# Altium PCB VSS-2026.PcbDoc
Units mm, origin at the board's own origin, x right, y up, seen from the top; angles counter-clockwise.
Board outline 75 x 55 mm, 2 copper layers (Top Layer, Bottom Layer), stack 1.671 mm thick; 40 components, 59 nets, 204 pads, 136 vias.
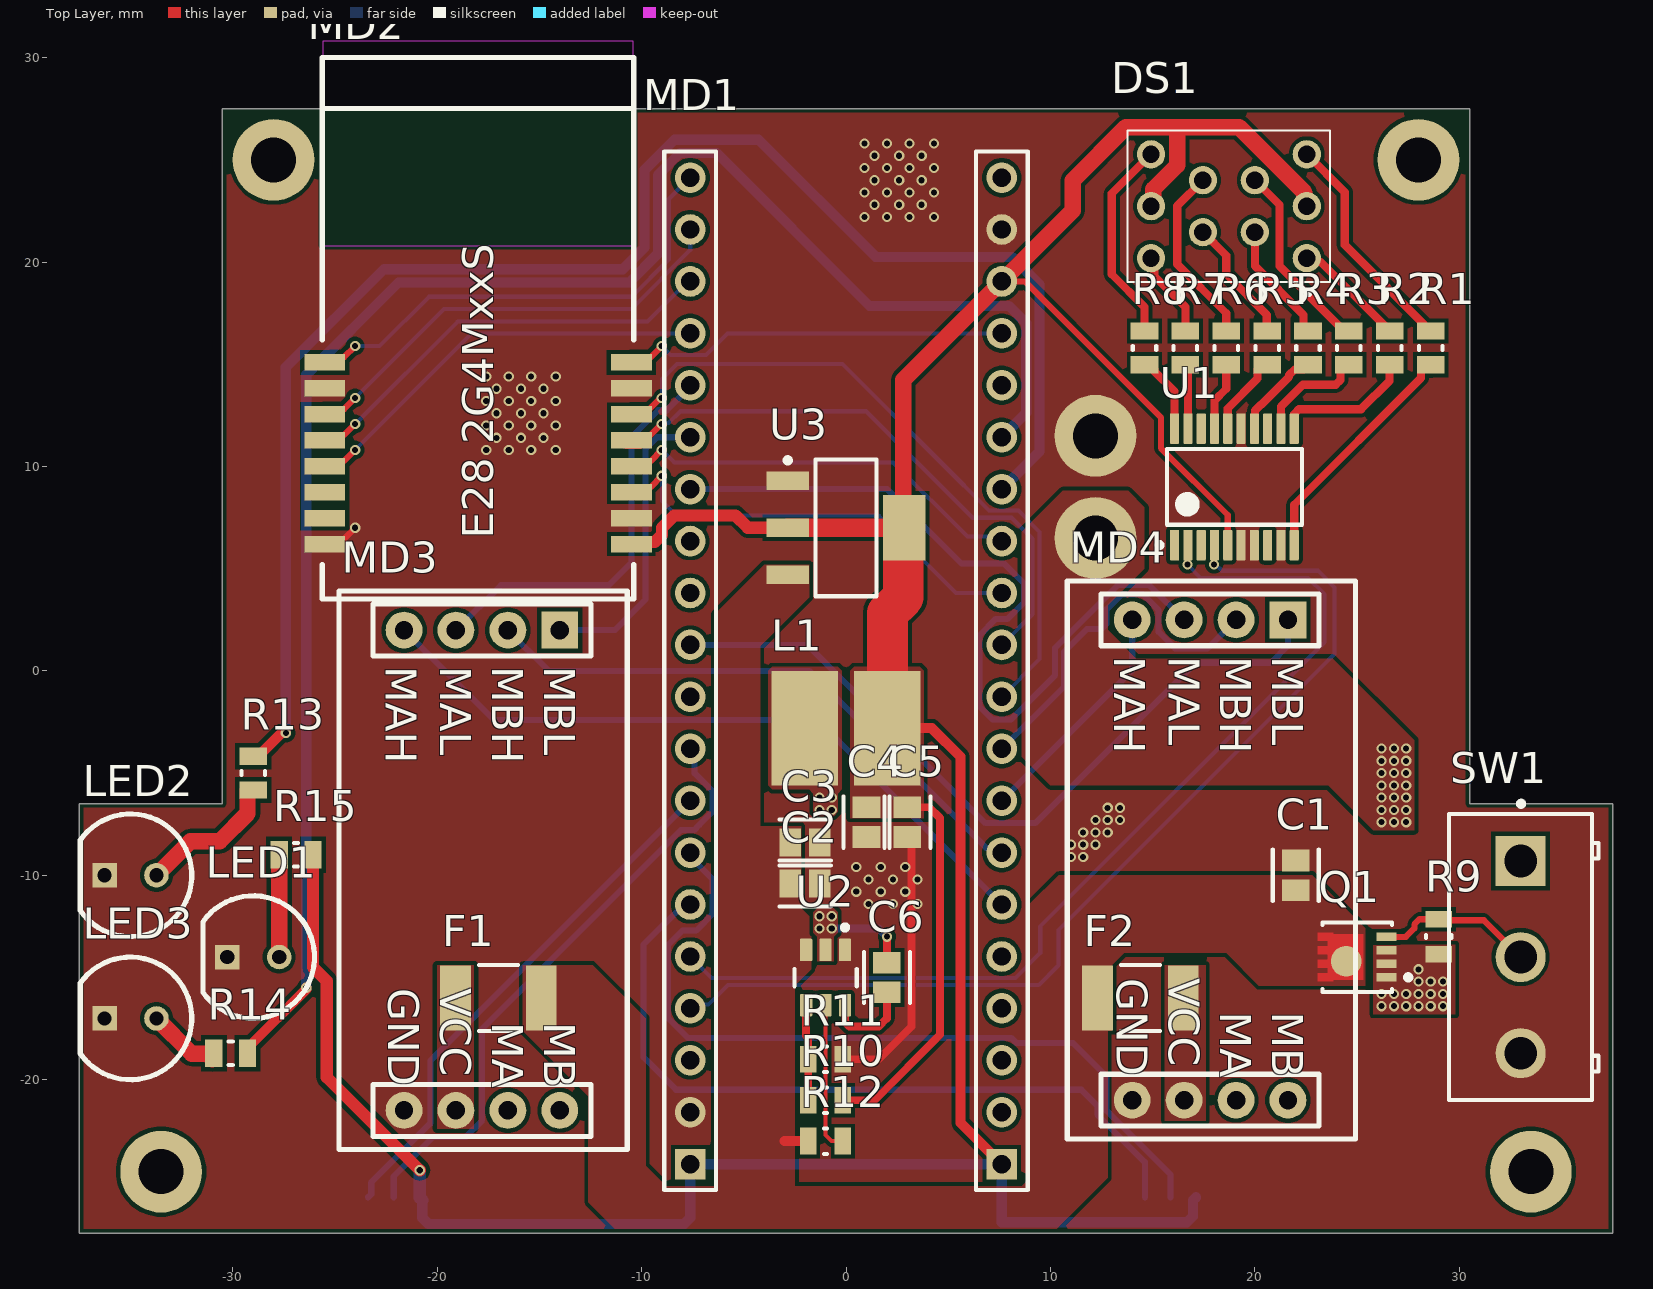
[diagram p0: Top Layer view]
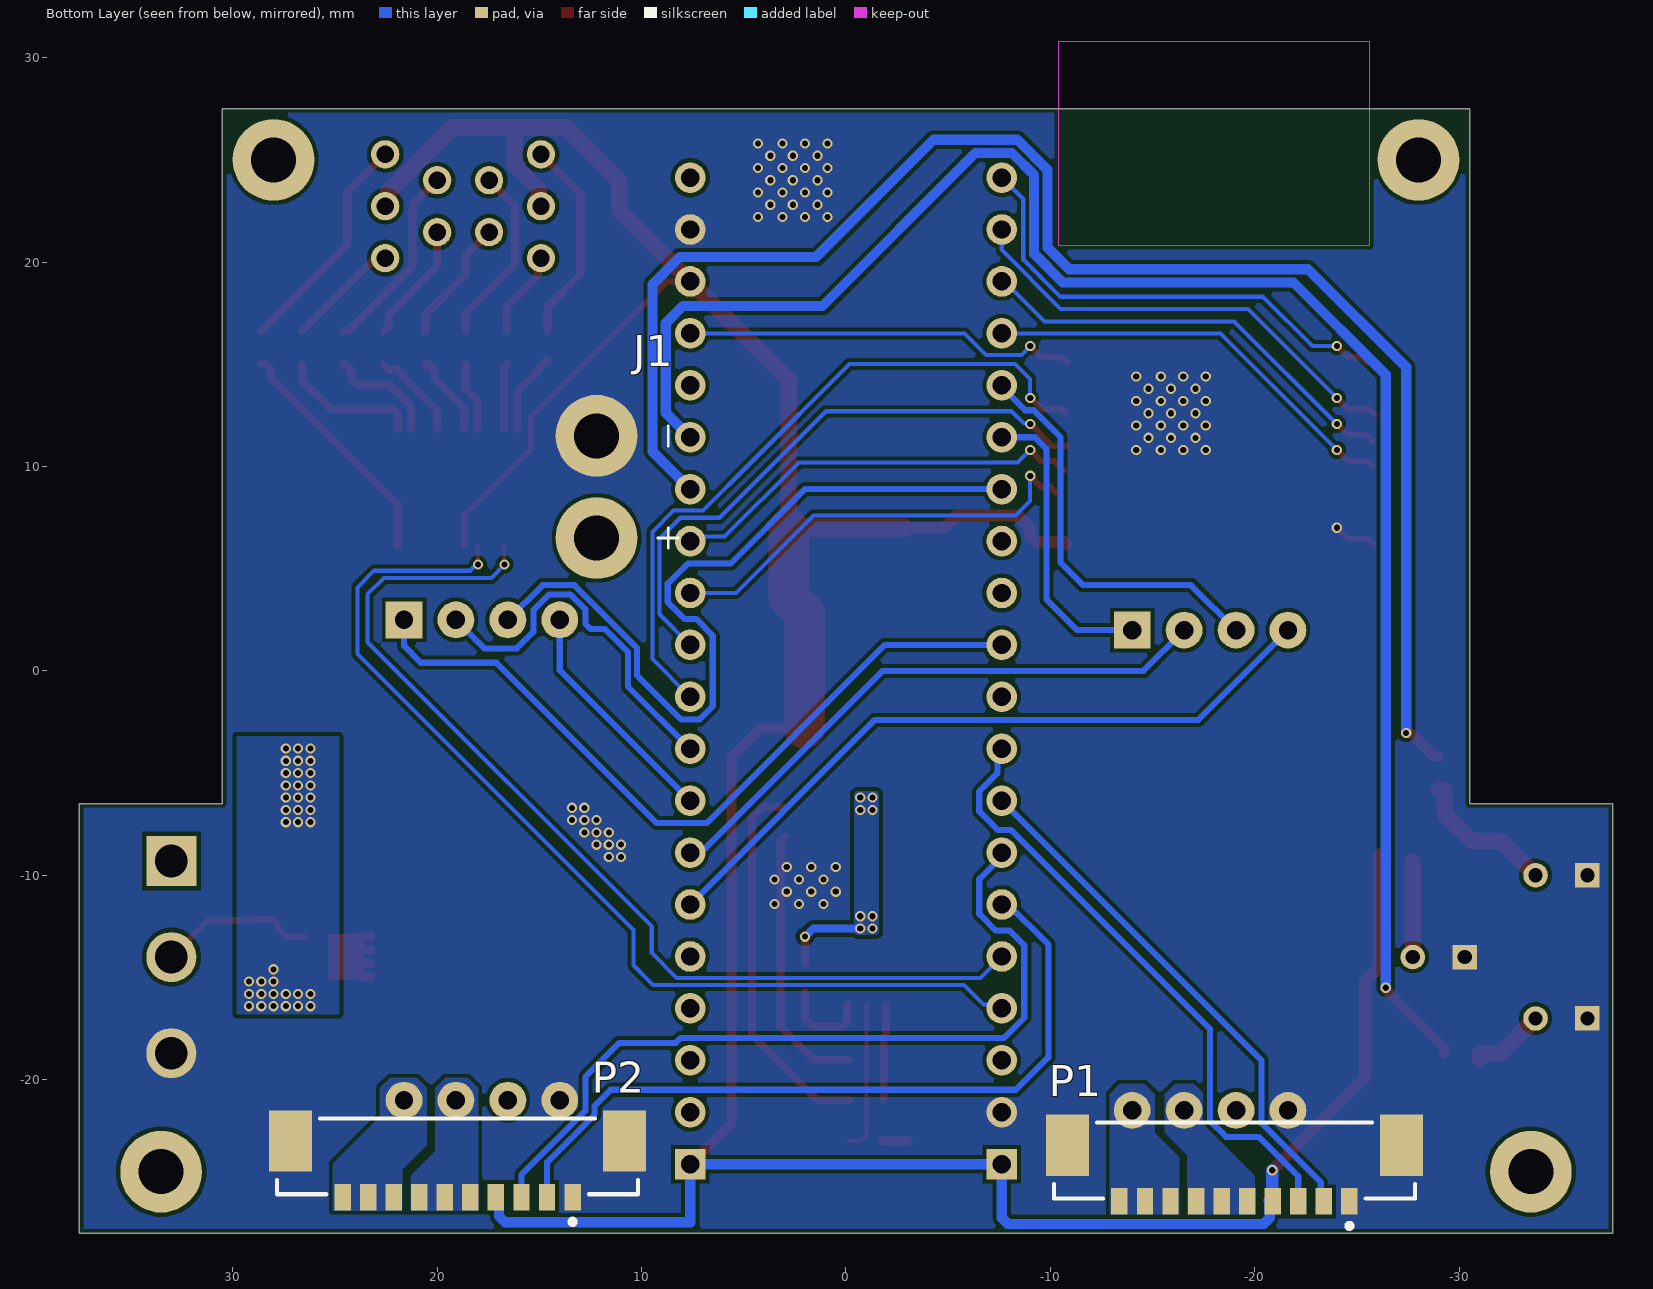
[diagram p1: Bottom Layer view, seen from below]

## Layer stack, top to bottom
Top Solder: solder mask 0.0102, Solder Resist, Dk 3.5
Top Layer: signal copper 0.0356
Dielectric 1: dielectric 1.6, FR-4, Dk 4.8
Bottom Layer: signal copper 0.0356
Bottom Solder: solder mask 0.0102, Solder Resist, Dk 3.5

## Board outline
30.5,27.5 30.5,-6.5 37.5,-6.5 37.5,-27.5 -37.5,-27.5 -37.5,-6.5 -30.5,-6.5 -30.5,27.5

## Design rules (kind name [scope] priority, off if disabled: settings)
BoardOutlineClearance [All] p1: gap=0.2 ignorepadtopadclearanceinfootprint=FALSE
Clearance [All] p1: gap=0.2 ignorepadtopadclearanceinfootprint=TRUE except(0.15: Arc-Arc Arc-Track Track-Track; 0.3: Via-Via)
ComponentClearance [All] p1: gap=0.2 collisioncheckmode=3 verticalgap=0.3 showdistances=FALSE
HoleSize [All] p1: absolutevalues=TRUE maxlimit=6 minlimit=0.2 maxpercent=80.000 minpercent=20.000
MinimumSolderMaskSliver [All] p1: minsoldermaskwidth=0.1
PolygonConnect [All] p1: connectstyle=Direct reliefconductorwidth=0.254 reliefentries=4 polygonreliefangle="90 Angle" airgapwidth=0.254
RoutingVias [All] p1: holewidth=0.3 width=0.5 viastyle="Through Hole" minholewidth=0.3 minwidth=0.5 maxholewidth=1 maxwidth=2
SolderMaskExpansion SolderMaskExpansion_via [IsVia] p1: expansion=0.102 istentingtop=TRUE
SolderMaskExpansion [All] p2: expansion=0.102 istentingtop=FALSE
SupplyNets "Schematic Supply Nets_4" [InNet('VBAT_SW')] p1: voltage=0.000
SupplyNets "Schematic Supply Nets_3" [InNet('VBAT')] p2: voltage=0.000
SupplyNets "Schematic Supply Nets_2" [InNet('3V3')] p3: voltage=0.000
SupplyNets "Schematic Supply Nets_1" [InNet('GND')] p4: voltage=0.000
Width [All] p1: maxlimit=2 minlimit=0.2 preferedwidth=0.3
27 further rules are at their usual default settings.

## Components (designator, comment, footprint, x,y, rotation, side; value= is the part's Value field where it differs from the comment)
C1 "10uF" FP-CL21-IPC_C 22,-10 r90 top
C2 "10uF" FP-CL21-IPC_C -2,-10.4 r0 top
C3 "100nF" FP-CL21-IPC_C -2,-8.4 r0 top
C4 "22uF" FP-CL21-IPC_C 1,-7.4 r270 top
C5 "22uF" FP-CL21-IPC_C 3,-7.4 r270 top
C6 "100nF" FP-CL21-IPC_C 2,-15 r270 top
DS1 "TDSG1150-LM" TDSG1150LM 22.54,20.19 r90 top
F1 "MF-MSMF030-2" BOUR-MF-MSMF030-2_V -17,-16 r0 top
F2 "MF-MSMF030-2" BOUR-MF-MSMF030-2_V 14.4,-16 r180 top
J1 "XT30" XT30 12.2,9 r90 bottom
L1 "CY54-2.2UH" INDP5852X48N 0,-2.8 r180 top
LED1 "LED_5mm" LED_5mm -29,-14 r0 top
LED2 "LED_5mm" LED_5mm -35,-10 r0 top
LED3 "LED_5mm" LED_5mm -35,-17 r0 top
MD1 "BlackPill" BlackPill 0,0 r90 top locked
MD2 "E28-2G4MxxS" E28-2G4M12S -18,6.2 r180 top
MD3 "PONTE-H MÓDULO DIP" PONTEH-PCB -14,-21.5 r270 top
MD4 "PONTE-H MÓDULO DIP" PONTEH-PCB 21.62,-21 r270 top locked
P1 "53398-1071" MOLX-53398-1071_V -19,-24.2 r180 bottom
P2 "53398-1071" MOLX-53398-1071_V 19,-24 r180 bottom locked
Q1 "SI7655ADN-T1-GE3" FP-C20-0862-SINGLE-MFG 25,-14 r180 top
R1 "100R" RESC2013X50X30LL20T20 28.6,15.8 r90 top
R2 "100R" RESC2013X50X30LL20T20 26.6,15.8 r90 top
R3 "100R" RESC2013X50X30LL20T20 24.6,15.8 r90 top
R4 "100R" RESC2013X50X30LL20T20 22.6,15.8 r90 top
R5 "100R" RESC2013X50X30LL20T20 20.6,15.8 r90 top
R6 "100R" RESC2013X50X30LL20T20 18.6,15.8 r90 top
R7 "100R" RESC2013X50X30LL20T20 16.6,15.8 r90 top
R8 "100R" RESC2013X50X30LL20T20 14.6,15.8 r90 top
R9 "100k" FP-CRCW0805-e3-IPC_C 29,-13 r270 top
R10 "33.2kΩ" FP-CRCW0805-e3-IPC_C -1,-21 r0 top
R11 "10kΩ" FP-CRCW0805-e3-IPC_C -1,-19 r180 top
R12 "10kΩ" FP-CRCW0805-e3-IPC_C -1,-23 r0 top
R13 "100R" RESC2013X50X30LL20T20 -29,-5 r270 top
R14 "100R" RESC2013X50X30LL20T20 -30.1,-18.7 r180 top
R15 "100R" RESC2013X50X30LL20T20 -26.9,-9 r0 top
SW1 "CS12ANW03" FP-CS12ANW03-MFG 33,-14 r270 top locked
U1 "PCF8574PWR" PW0020A_L 19,9 r90 top
U2 "TPS563208DDCR" FP-DDC0006A-MFG -1,-15 r270 top
U3 "LD1117STR" SOT-223_L 0,7 r0 top

## Footprints (in the part's own frame and the unit in brackets; to place one, negate y for a bottom-side part, rotate by r counter-clockwise, add the part's x,y. Pads: shape width x height; smd on the part's side, far side on the other; paste and mask are expansions set on the pad)
BlackPill [mm] "STM32F4x1C BluePill"
  rect 1.5x1.5 hole 0.9: 1(-24.13,-7.62) 40(-24.13,7.62)
  round 1.5 hole 0.9: 2(-21.59,-7.62) 3(-19.05,-7.62) 4(-16.51,-7.62) 5(-13.97,-7.62) 6(-11.43,-7.62) 7(-8.89,-7.62) 8(-6.35,-7.62) 9(-3.81,-7.62) 10(-1.27,-7.62) 11(1.27,-7.62) 12(3.81,-7.62) 13(6.35,-7.62) 14(8.89,-7.62) 15(11.43,-7.62) 16(13.97,-7.62) 17(16.51,-7.62) 18(19.05,-7.62) 19(21.59,-7.62) 20(24.13,-7.62) 21(24.13,7.62) 22(21.59,7.62) 23(19.05,7.62) 24(16.51,7.62) 25(13.97,7.62) 26(11.43,7.62) 27(8.89,7.62) 28(6.35,7.62) 29(3.81,7.62) 30(1.27,7.62) 31(-1.27,7.62) 32(-3.81,7.62) 33(-6.35,7.62) 34(-8.89,7.62) 35(-11.43,7.62) 36(-13.97,7.62) 37(-16.51,7.62) 38(-19.05,7.62) 39(-21.59,7.62)
  silkscreen extent -25.4,-8.89 25.4,8.89, body extent -29.98,-10.16 26.66,10.16, height 16.26
BOUR-MF-MSMF030-2_V [mm] "SMD, 2-Leads, Body 4.55x3.24mm"
  rect 1.5x3.2 smd: 1(-2.1,0) 2(2.1,0)
  silkscreen extent -0.95,-1.62 0.95,1.62, body extent -2.27,-1.62 2.27,1.62, height 1.1
E28-2G4M12S [mm] "E28-2G4M12S Module"
  rect 2x0.8 smd: 1(-7.5,0) 2(-7.5,-1.27) 3(-7.5,-2.54) 4(-7.5,-3.81) 5(-7.5,-5.08) 6(-7.5,-6.35) 7(-7.5,-7.62) 8(-7.5,-8.89) 9(7.5,-8.89) 10(7.5,-7.62) 11(7.5,-6.35) 12(7.5,-5.08) 13(7.5,-3.81) 14(7.5,-2.54) 15(7.5,-1.27) 16(7.5,0)
  silkscreen extent -7.62,-23.81 7.62,2.69, body extent -7.5,-21.31 7.5,2.69, height 2.83
FP-C20-0862-SINGLE-MFG [mil]
  rect 39x16 smd paste+0 mask+0: 1(-56.5,39) 2(-56.5,13) 3(-56.5,-13) 4(-56.5,-39)
  round 59.4 smd paste+0 mask+0: 5-6-7-8(21,8)
  Top Layer region: 76,47 46,47 46,44 -12,44 -12,-44 46,-44 46,-47 76,-47 76,-31 56,-31 56,-21 76,-21 76,-5 56,-5 56,5 76,5 76,21 56,21 56,31 76,31 76,47
  silkscreen extent -103,-67 67,67, body extent -80,-71 80,71, height 10
FP-CL21-IPC_C [mm]
  rect 1.055x1.356 smd paste+0 mask+0: 1(-0.726,0) 2(0.726,0)
  silkscreen extent -1.25,-1.12 1.25,1.12, body extent -1.35,-0.82 1.35,0.82, height 0.25
FP-CRCW0805-e3-IPC_C [mil]
  rect 31.75x51.5 smd paste+0 mask+0: 1(-33.5,0) 2(33.5,0)
  silkscreen extent -3,-25 3,25, body extent -53,-31 53,31, height 10
FP-CS12ANW03-MFG [mm]
  rect 2.45x2.45 hole 1.6 paste-2539.97 mask+0: 1(-4.7,0)
  round 2.45 hole 1.6 paste-2539.97 mask+0: 2(0,0) 3(4.7,0)
  silkscreen extent -7.62,-3.5 7,3.8, body extent -7.1,-3.6 7.1,3.91, height 0.25
FP-DDC0006A-MFG [mm]
  rrect17% 1.1x0.6 smd paste+0 mask+0: 1(-1.35,0.95) 2(-1.35,0) 3(-1.35,-0.95) 4(1.35,-0.95) 5(1.35,0) 6(1.35,0.95)
  silkscreen extent -2.57,-1.53 0.42,1.53, body extent -2,-1.63 2,1.63, height 0.25
INDP5852X48N [mm] "Precision Wire Wound Inductor, 2-Leads, Body 5.80x5.20mm, IPC Medium Density"
  rect 3.25x5.6 smd: 1(-2.025,0) 2(2.025,0)
  body extent -3,-2.75 3,2.75, height 4.95
LED_5mm [mm] "LED 5mm generic"
  rect 1.2x1.2 hole 0.7: 1(-1.27,0)
  round 1.2 hole 0.7: 2(1.27,0)
  silkscreen extent -2.46,-3 3,3, body extent -2.5,-2.99 3,2.99, height 8.65
MOLX-53398-1071_V [mm] "SMD, 10-Leads, Body 17.65x3.7mm, Pitch 1.25mm"
  rect 0.8x1.3 smd: 1(5.625,-1.75) 2(4.375,-1.75) 3(3.125,-1.75) 4(1.875,-1.75) 5(0.625,-1.75) 6(-0.625,-1.75) 7(-1.875,-1.75) 8(-3.125,-1.75) 9(-4.375,-1.75) 10(-5.625,-1.75)
  rect 2.1x3 smd: MP1(8.175,1) MP2(-8.175,1)
  silkscreen extent -8.82,-3.07 8.82,2.1, body extent -8.82,-2.1 8.83,2.1, height 4.77
PONTEH-PCB [mm]
  rect 1.8x1.8 hole 0.9: 1(-23.495,0)
  round 1.8 hole 0.9: 2(-23.495,-2.54) 3(-23.495,-5.08) 4(-23.495,-7.62) 5(0,-7.62) 6(0,-5.08) 7(0,-2.54) 8(0,0)
  silkscreen extent -25.4,-10.8 1.9,3.3, body extent -25.46,-10.79 1.84,3.3, height 14.75
PW0020A_L [mm] "SOP, 20-Leads, Body 6.6x4.5mm, Pitch 0.65mm, IPC High Density"
  rrect25% 1.5x0.45 smd mask+0: 1(-2.85,2.925) 2(-2.85,2.275) 3(-2.85,1.625) 4(-2.85,0.975) 5(-2.85,0.325) 6(-2.85,-0.325) 7(-2.85,-0.975) 8(-2.85,-1.625) 9(-2.85,-2.275) 10(-2.85,-2.925) 11(2.85,-2.925) 12(2.85,-2.275) 13(2.85,-1.625) 14(2.85,-0.975) 15(2.85,-0.325) 16(2.85,0.325) 17(2.85,0.975) 18(2.85,1.625) 19(2.85,2.275) 20(2.85,2.925)
  silkscreen extent -2.97,-3.3 1.85,3.8, body extent -3.21,-3.25 3.21,3.25, height 1
RESC2013X50X30LL20T20 [mm] "Chip Resistor, 2-Leads, Body 2.00x1.25mm, IPC High Density"
  rect 0.85x1.35 smd: 1(-0.825,0) 2(0.825,0)
  silkscreen extent -0.1,-0.58 0.1,0.58, body extent -1.1,-0.72 1.1,0.72, height 0.5
SOT-223_L [mm] "SOT223, 4-Leads, Body 6.5x3.5mm, Pitch 2.3mm, Lead Span 7mm, IPC High Density"
  rect 2.1x0.9 smd: 1(-2.85,2.3) 2(-2.85,0) 3(-2.85,-2.3)
  rect 2.1x3.2 smd: 4(2.85,0)
  silkscreen extent -2.97,-3.35 1.5,3.42, body extent -1.85,-3.35 1.85,3.35, height 1.8
TDSG1150LM [mm]
  round 1.381 hole 0.85: 1(0,0) 2(1.27,2.54) 3(2.54,0) 4(3.81,2.54) 5(5.08,0) 6(5.08,7.62) 7(3.81,5.08) 8(2.54,7.62) 9(1.27,5.08) 10(0,7.62)
  silkscreen extent -1.8,-1.14 6.24,8.76, body extent -1.16,-1.14 6.24,8.76, height 6
XT30 [mm]
  round 4 hole 2.2: N(2.5,0) P(-2.5,0)
  silkscreen extent -3,-4 3,-3, body extent -5.15,-2.77 5.15,2.77, height 10.7

## Part data
C1 C2: library part CMP-13271-002240-1, "CL21 Series 0805 10uF 16V ±10% Tolerance X5R Multilayer Ceramic Chip Capacitor", Case Code (Imperial)=0805, Case Code (Metric)=2012, Dielectric=X5R, Max Operating Temperature=85°C, Min Operating Temperature=-55°C, Package Quantity=3000, Tolerance=10%, Voltage=16V, Capacitance=10uF, Case/Package=0805, Depth=1.25mm, Height=1.25mm, Length=2mm, Material=Ceramic, Mount="Surface Mount", Packaging="Tape and Reel", Thickness=0.053inch, Voltage Rating=16V, Width=0.049inch
C3 C6: library part CMP-13271-002854-1, "CL21 Series 0805 100nF 25V ±10% Tolerance X7R Multilayer Ceramic Chip Capacitor", Case Code (Imperial)=0805, Case Code (Metric)=2012, Dielectric=X7R, Max Operating Temperature=125°C, Min Operating Temperature=-55°C, Package Quantity=1, Tolerance=10%, Voltage=25V, Capacitance=100nF, Case/Package=0805, Contact Plating=Tin, Depth=1.25mm, Height=0.85mm, Length=2mm, Mount="Surface Mount", Packaging="Tape and Reel", Radiation Hardening=No, Thickness=0.037inch, Voltage Rating=25V, Width=0.049inch
C4 C5: library part CMP-13271-003225-1, "CL21 Series 0805 22uF 25V ±20% Tolerance X5R Multilayer Ceramic Chip Capacitor"
DS1: "LED Displays & Accessories 7-Seg Green 7 mm Common anode", Manufacturer_Name=Vishay, Mouser Part Number=78-TDSG1150-LM, Datasheet Link=http://www.vishay.com/docs/83124/tdsg11.pdf, Geometry.Height=7.2mm, Manufacturer_Part_Number=TDSG1150-LM, Mouser Price/Stock=https://www.mouser.co.uk/ProductDetail/Vishay-Semiconductors/TDSG1150-LM?qs=1F7whG1WZO07bTxUDRW5PQ%3D%3D
F1 F2: library part CMP-2000-06692-1, "MF-MSMF Series - PTC Resettable Fuse, 30 V, -40 to 85 degC, 2-Pin SMD (1812), RoHS, Tape and Reel", Carrying Current Max=10A, Current Rating=10000mA, Holding Current=300mA, Initial Resistance Max=3ohm, Manufacturer=Bourns, Operating Voltage=30V, Package Description="2-Pin SMD, Body 4.55 x 3.24 mm", PartNumber=MF-MSMF, PTC Fuse Case=1812^4532Metric], Tripped Power Dissipation=800mW, Tripping Current=600mA, Datasheet URL=https://datasheet.ciiva.com/19479/1164197-19479043.pdf, Datasheet Version="Rev. O, 08/2006", Manufacturer URL=http://www.bourns.com/, Mounting Technology=SurfaceMount, Package Reference=MF-MSMF030-2, Series=MF-MSMF, SVHC=NoSVHC(20-Jun-2013), Voltage Rating=30V
J1: "Socket; DC supply; XT30; male; PIN: 2; on PCBs; THT; Colour: yellow", Package=None, Availability="Not in stock", Check_prices=https://www.snapeda.com/parts/XT30PW-M/AMASS/view-part/?ref=eda, MF=AMASS, MP=XT30PW-M, Price=None, SnapEDA_Link=https://www.snapeda.com/parts/XT30PW-M/AMASS/view-part/?ref=snap
L1: "4A 2.2uH ±20% 22.1mΩ SMD,5.8x5.2mm Inductors (SMD) ROHS"
LED1 LED2 LED3: "LED 5mm generic"
MD1: "STM32F4x1CxU6 BlackPill"
MD2: "E28-2G4MxxS Ebyte SX1280 Module"
MD3 MD4: library part PONTEH-2016, "MÓDULO PONTE H DIP ROBOIME"
P1 P2: library part CMP-2000-05635-1, "Male Header, Pitch 1.25 mm, 1 x 10 Position, Height 4.7 mm, -40 to 85 degC, RoHS, Tape and Reel", Current Rating=1A, Manufacturer=Molex, Package Description="Male Header, Pitch 1.25 mm, 1 x 10 Position, Height 4.7 mm", Voltage Rating=125V, Brand=Molex, Contact Gender=Pin(Male), Contact Material=PhosphorBronze, Contact Plating=Tin, Datasheet URL=http://www.molex.com/pdm_docs/sd/533981071_sd.pdf, Datasheet Version="Rev. J, 09/2015", Factory Pack Quantity=1000, Housing Material=Nylon, Manufacturer URL=http://www.molex.com/, Mounting Angle=Vertical, Mounting Style=SMD, Mounting Technology=SurfaceMount, Number of Positions=10Position, Number of Rows=1Row, Package Reference=53398-1071, Packaging=Reel, Pitch=1.25mm, Product=Headers, Product Category=Headers&WireHousings, RoHS=Details, Series=53398, Termination Style=SMD, Tradename=PicoBlade, Type=Shrouded
Q1: library part CMP-00030-31553184-1, "SI7655ADN-T1-GE3 20V 40A 3.6m´Î@10V20A 57W 1.1V@250Ã×A P Channel PowerPAK 1212-8S MOSFETs ROHS", Continuous Drain Current (ID)=-40A, Drain to Source Breakdown Voltage=-20V, Drain to Source Resistance=3.6mΩ, Drain to Source Voltage (Vdss)=20V, Gate to Source Voltage (Vgs)=12V, Input Capacitance=6.6nF, Max Operating Temperature=150°C, Max Power Dissipation=57W, Min Operating Temperature=-50°C, Resistance=3mΩ, Fall Time=35ns, Mount="Surface Mount", NexarPartId=31553184, Number of Channels=1, Number of Pins=8, Rds On Max=3.6mΩ, REACH SVHC="No SVHC", Rise Time=45ns, RoHS=Compliant, Schedule B="8541290080, 8541290080", Turn-Off Delay Time=100ns, Turn-On Delay Time=45ns
R1 R2 R3 R4 R5 R6 R7 R8 R13 R14 R15: library part CMP-2001-04901-1, Manufacturer="Vishay Dale", Part Number=CRCW0805100RFKEA
R9: library part CMP-2001-04899-2, "RES Thick Film, 100kΩ, 1%, 0.125W, 100ppm/°C, 0805", Case Code (Imperial)=0805, Case Code (Metric)=2012, Max Operating Temperature=155°C, Min Operating Temperature=-55°C, Package Quantity=5000, Power Rating=125mW, Resistance=100kR, Temperature Coefficient=100ppm/°C, Tolerance=1%, Voltage Rating=150V, Case/Package=0805, Composition="Thick Film", Contact Plating=Tin, Depth=1.25mm, Height=0.45mm, Lead Free="Lead Free", Length=2mm, Military Standard=Not, Mount="Surface Mount", Number of Pins=2, Packaging="Tape and Reel", Radiation Hardening=No, Termination=SMD/SMT, Voltage Rating (DC)=150V, Weight=0.000194oz, Width=1.25mm
R10: library part CMP-2001-03829-2, "RES Thick Film, 33.2kΩ, 1%, 0.125W, 100ppm/°C, 0805", Case Code (Imperial)=0805, Case Code (Metric)=2012, Max Operating Temperature=155°C, Max Power Dissipation=125mW, Min Operating Temperature=-55°C, Package Quantity=10, Resistance=33.2kR, Temperature Coefficient=100ppm/°C, Tolerance=1%, Voltage Rating=150V, Case/Package=0805, Composition="Thick Film", Contact Plating=Tin, Depth=1.25mm, Features="Automotive AEC-Q200", Height=0.45mm, Lead Free="Lead Free", Length=2mm, Military Standard=Not, Number of Terminations=2, Packaging="Tape and Reel", Power Rating=125mW, Radiation Hardening=No, Termination=SMD/SMT, Voltage Rating (DC)=150V, Weight=0.000194oz, Width=0.049inch
R11 R12: library part CMP-2001-04908-2, "RES Thick Film, 10kΩ, 1%, 0.125W, 100ppm/°C, 0805", Case Code (Imperial)=0805, Case Code (Metric)=2012, Max Operating Temperature=155°C, Min Operating Temperature=-55°C, Package Quantity=5000, Power Rating=125mW, Resistance=10kR, Temperature Coefficient=100ppm/°C, Tolerance=1%, Voltage Rating=150V, Case/Package=0805, Composition="Thick Film", Contact Plating=Tin, Depth=1.25mm, Height=0.45mm, Lead Free="Lead Free", Length=2mm, Military Standard=Not, Packaging="Tape and Reel", Radiation Hardening=No, Termination=SMD/SMT, Voltage Rating (DC)=150V, Weight=0.000194oz, Width=1.25mm
SW1: library part CMP-31746-000002-1, "SWITCH SLIDE SPDT 3A 125V", Contact Current Rating=3A, Flammability Rating="UL94 V-0", Max Operating Temperature=85°C, Max Voltage Rating (AC)=250V, Min Operating Temperature=-30°C, Package Quantity=1, Voltage Rating (AC)=125V, Actuator Length=5.1mm, Actuator Material=Nylon, Actuator Type=Standard, Contact Material=Copper, Contact Plating=Silver, Contact Style=Non-Shorting, Current Rating=3A, Depth=7.5mm, Electrical Life=20000Cycles, Illumination Type=Non-Illuminated, Lead Free="Lead Free", Length=14mm, Max Current Rating=3A, Mechanical Life=50000Cycles, Mount="Through Hole", Orientation=Vertical, Packaging=Tray, Primary Type=SWITCH, Reach SVHC Compliant=Yes, RoHS Compliant=Yes, Series=CS, Switch Function=On-On, Switch Travel=2.2mm, Termination="PC Pin", Throw Configuration=SPDT
U1: library part CMP-0314-00348-2, "Remote 8-Bit I/O Expander for I2C-Bus, 2.5 to 6 V, -40 to 85 degC, 20-pin TSSOP (PW), Green (RoHS & no Sb/Br)", Manufacturer="Texas Instruments", Max Frequency(kHz)=100, Voltage Nodes(V)="5, 3.3", # of I/Os=8, Code_JEDEC=MO-153, ComponentLink1Description=Datasheet, ComponentLink1URL=http://www.ti.com/general/docs/lit/getliterature.tsp?genericPartNumber=PCF8574&fileType=pdf, DatasheetVersion=SCPS068G, Eco-Plan="Green (RoHS & no Sb/Br)", fSCLK(Max)(MHz)=0.1, I2C Address="0100 xxx", Interrupt Output=Yes, Mounting Technology="Surface Mount", PackageDescription="20-Pin Plastic Thin Small Outline Package 6.5 x 4.4 mm Body ,0.65 mm Pitch", PackageReference=PW0020A, PackageVersion="revG, Feb-2011", PartNumber=PCF8574PWR, Push-Pull I/O Type=Yes, Reset Input=No, SubFamily="I2C IO Expander", Vcc range(V)="2.5 to 6.0", VCC(Max)(V)=6, VCC(Min)(V)=2.5
U2: library part CMP-04918-000356-1, "IC REG BUCK ADJ 3A TSOT23-6", Case/Package=SOT-23-6, Max Input Voltage=17V, Max Operating Temperature=125°C, Max Output Voltage=7V, Min Input Voltage=4.5V, Min Operating Temperature=-40°C, Min Output Voltage=768mV, Output Current=3A, Quiescent Current=400uA, Switching Frequency=580kHz, Lead Free="Lead Free", Mount="Surface Mount", Number of Outputs=1, Output Configuration=Positive, Output Type=Adjustable, Packaging="Tape and Reel", RoHS Compliant=Yes, Synchronous Rectifier=Yes
U3: library part CMP-0244-00313-1, "Adjustable Low Drop Voltage Regulator, 1.25 to 15V, 4-Pin SOT-223, Tape and Reel", ComponentLink1Description="Manufacturer URL", ComponentLink1URL=http://www.st.com, ComponentLink2Description=Datasheet, ComponentLink2URL=http://www.st.com/internet/com/TECHNICAL_RESOURCES/TECHNICAL_LITERATURE/DATASHEET/CD00000544.pdf, DatasheetVersion=1/11/2011, PackageDescription="4-Pin SOT-223 Package, 6.5 x 3.5 mm Body, 2.3 mm Pitch, 7 mm Lead Span", PackageReference=SOT-223, PackageVersion=2010

## Free pads (board coordinates)
  round 4 hole 2.2: M1(-28,25) M2(28,25) M3(33.5,-24.5) M4(-33.5,-24.5)

## Via types
v1: diameter 0.5, hole 0.3, Top Layer to Bottom Layer, tented both sides, 136 vias

## Nets (pads, with @x,y where several pads share a name; then routed paths per layer and width w, separated by ;. In a path a pad name is that pad's centre, name@x,y a point inside that pad or via, vN(x,y) a via of type N, cw(c..) or ccw(c..) an arc to the next point about the centre after c; other vN are vias at no path point)
3V3: C4.1 C5.1 DS1.3 DS1.8 L1.1 MD1.1 MD1.18 MD1.40 MD2.1 P1.4 P2.4 R10.2 R15.2 U1.5 U3.2 U3.4 | length 189.9
  Top Layer w0.3: MD1.18 8.75,19.05 15.4,12.4 15.4,10.9 18.675,7.625 U1.5
  Top Layer w0.381: R10.2 1.4,-21 4.6,-17.8 4.6,-7.2 4.074,-6.674 C5.1
  Top Layer w0.5: L1.1 4.2,-2.8 5.6,-4.2 5.6,-22.11 MD1.1
  Top Layer w0.6: R15.2 -26.075,-14.5 -25.4,-15.175 -25.4,-19.874 v1(-20.849,-24.425) ; MD2.1@-10.771,6.2 -10.671,6.3 -9.351,6.3 -9,6.651 -9,7 -8.4,7.6 -5.4,7.6 -4.8,7 U3.2
  Top Layer w0.8: U3.4@2.8,6.95 2.8,14.23 MD1.18 11.089,22.519 11.089,23.989 13.7,26.6 16.21,26.6 ; DS1.8 15.031,22.841 15.031,23.556 16.211,24.735 16.211,26.6 ; DS1.3 22.429,22.841 22.429,23.396 19.225,26.6 16.21,26.6
  Top Layer w0.9: U3.2 U3.4@2.75,7
  Top Layer w2: L1.1 2.025,2.825 2.8,3.6 U3.4@2.8,6.95
  Bottom Layer w0.5: P1.4@-20.725,-25.9 -20.725,-26.757 -20.432,-27.05 -7.913,-27.05 -7.62,-26.757 MD1.40 MD1.1 7.62,-26.9 ; 7.62,-26.97 16.682,-26.97 16.975,-26.677 16.975,-25.9 P2.4
  Bottom Layer w0.6: v1(-20.849,-24.425) -20.849,-25.776 P1.4@-20.725,-25.9
a: DS1.7 R6.2 | length 8.9
  Top Layer w0.4: DS1.7 16.2,22.74 16.2,19.893 18.6,17.493 R6.2
b: DS1.6 R8.2 | length 10.1
  Top Layer w0.4: R8.2 14.6,17.8 13,19.4 13,23.35 DS1.6
c: DS1.4 R3.2 | length 9.4
  Top Layer w0.4: DS1.4 21.2,22.8 21.2,19.8 24.125,16.875 24.125,16.85 24.35,16.625 R3.2
d: DS1.2 R4.2 | length 5.9
  Top Layer w0.4: DS1.2 20,19.8 22.384,17.416 22.384,16.841 R4.2
DP: DS1.5 R1.2 | length 11.2
  Top Layer w0.4: DS1.5 24.4,23.41 24.4,20.825 R1.2
e: DS1.1 R2.2 | length 5.5
  Top Layer w0.4: DS1.1 22.728,20.002 23.223,20.002 R2.2
f: DS1.10 R7.2 | length 4.3
  Top Layer w0.4: DS1.10 15.078,20.032 15.078,19.322 16.6,17.8 R7.2
g: DS1.9 R5.2 | length 6.1
  Top Layer w0.4: DS1.9 18.6,20.32 18.6,19.4 20.584,17.416 20.584,16.641 R5.2
GND: C1.2 C2.2 C3.2 C4.2 C5.2 J1.N LED1.1 LED2.1 LED3.1 MD1.19 MD1.39 MD2.2 MD2.7 MD2.10 MD2.16 MD3.5 MD4.5 P1.1 P1.MP1 P1.MP2 P2.1 P2.MP1 P2.MP2 R11.1 SW1.3 U1.6 U1.7 U1.9 U1.15 U2.1 U3.1 | length 15.5
  Top Layer w0.3: MD2.16@-25.81,6.2 -25.56,6.45 -24.56,6.45 v1(-24.01,7)
  Top Layer w0.381: R11.1 1.6,-19 3.2,-17.4 3.2,-8.326 C5.2
  other v1: 1.1,-11.4 2.3,-11.4 3.5,-11.4 0.5,-10.8 1.7,-10.8 2.9,-10.8 1.1,-10.2 2.3,-10.2 3.5,-10.2 0.5,-9.6 1.7,-9.6 2.9,-9.6 11,-9.1 11.6,-9.1 11,-8.5 11.6,-8.5 12.2,-8.5 11.6,-7.9 12.2,-7.9 12.8,-7.9 12.2,-7.3 12.8,-7.3 13.4,-7.3 12.8,-6.7 13.4,-6.7 -17.6,10.8 -16.5,10.8 -15.4,10.8 -14.2,10.8 -17.1,11.4 -15.9,11.4 -14.8,11.4 -17.6,12 -16.5,12 -15.4,12 -14.2,12 -17.1,12.6 -15.9,12.6 -14.8,12.6 -17.6,13.2 -16.5,13.2 -15.4,13.2 -14.2,13.2 -17.1,13.8 -15.9,13.8 -14.8,13.8 -17.6,14.4 -16.5,14.4 -15.4,14.4 -14.2,14.4 0.9,22.2 2,22.2 3.1,22.2 4.3,22.2 1.4,22.8 2.6,22.8 3.7,22.8 0.9,23.4 2,23.4 3.1,23.4 4.3,23.4 1.4,24 2.6,24 3.7,24 0.9,24.6 2,24.6 3.1,24.6 4.3,24.6 1.4,25.2 2.6,25.2 3.7,25.2 0.9,25.8 2,25.8 3.1,25.8 4.3,25.8
LED2: MD1.14 R13.1 | length 77.4
  Top Layer w0.5: R13.1 -28.75,-4.175 -27.608,-3.033 v1(-27.4,-3.033)
  Bottom Layer w0.5: v1(-27.4,-3.033) -27.4,14.85 -22.6,19.65 -10.914,19.65 -9.85,20.714 -9.85,24.516 -8.386,25.98 -4.283,25.98 1.447,20.25 8.117,20.25 9.47,18.897 9.47,10.74 MD1.14
LED3: MD1.15 R14.1 | length 85.9
  Top Layer w0.5: R14.1 -29.275,-18.45 -26.4,-15.575 v1(-26.4,-15.5)
  Bottom Layer w0.5: v1(-26.4,-15.5) -26.4,14.49 -21.89,19 -10.6,19 -9.2,20.4 -9.2,24.247 -8.117,25.33 -6.33,25.33 1.15,17.85 7.977,17.85 8.82,17.007 8.82,12.63 MD1.15
M0_A: MD3.7 P1.5 P1.6 P1.7
M0_B: MD3.8 P1.8 P1.9 P1.10
M0_ENCA: MD1.32 P1.3 | length 30.2
  Bottom Layer w0.3: P1.3@-22.125,-25.75 -22.125,-24.725 -20.2,-22.8 -18.6,-22.8 -17.8,-22 -17.8,-17.514 -8.076,-7.79 -7.434,-7.79 -7.17,-7.526 -6.52,-6.876 -6.52,-5.894 -7.404,-5.01 -7.404,-4.026 MD1.32
M0_ENCB: MD1.33 P1.2 | length 25.9
  Bottom Layer w0.3: P1.2@-23.375,-25.75 -23.226,-25.601 -23.226,-25.026 -20.33,-22.13 -20.33,-19.06 MD1.33
M0_MAH: MD1.6 MD3.4 | length 34.8
  Bottom Layer w0.3: MD3.4 -17.225,-2.4 -1.41,-2.4 MD1.6
M0_MAL: MD1.25 MD3.3 | length 20.1
  Bottom Layer w0.3: MD3.3 -16.875,4.2 -11.6,4.2 -10.5,5.3 -10.5,11.439 -9.189,12.75 -8.761,12.75 -7.62,13.891 MD1.25
M0_MBH: MD1.7 MD3.2 | length 28.7
  Bottom Layer w0.3: MD3.2 -14.545,0 -1.8,0 6.86,-8.66 7.39,-8.66 MD1.7
M0_MBL: MD1.26 MD3.1 | length 14.6
  Bottom Layer w0.3: MD3.1 -11.305,1.995 -9.8,3.5 -9.8,10.869 -9.239,11.43 MD1.26
M1_A: MD4.7 P2.5 P2.6 P2.7
M1_B: MD4.8 P2.8 P2.9 P2.10
M1_ENCA: MD1.34 P2.3 | length 39.7
  Bottom Layer w0.3: MD1.34 -7.62,-9.086 -6.52,-10.186 -6.52,-11.886 -7.334,-12.7 -8,-12.7 -8.72,-13.42 -8.72,-16.966 -7.736,-17.95 8.076,-17.95 8.326,-18.2 11.1,-18.2 12.75,-19.85 12.75,-21.518 15.875,-24.643 P2.3
M1_ENCB: MD1.35 P2.2 | length 37.2
  Bottom Layer w0.3: MD1.35 -7.945,-11.43 -9.898,-13.384 -9.898,-18.902 -8.31,-20.49 11.511,-20.49 12.3,-21.279 12.3,-21.704 14.625,-24.029 P2.2
M1_MAH: MD1.8 MD4.4 | length 11.5
  Bottom Layer w0.3: MD1.8 14,0.03 MD4.4
M1_MAL: MD1.27 MD4.3 | length 40
  Bottom Layer w0.3: MD1.27 2.01,8.89 5.65,5.25 7.736,5.25 8.72,4.266 8.72,3.354 7.906,2.54 7.334,2.54 6.52,1.726 6.52,-1.726 7.164,-2.37 8.076,-2.37 10.216,-0.23 10.216,1.115 13.296,4.195 14.84,4.195 MD4.3
M1_MBH: MD1.9 MD4.2 | length 18.3
  Bottom Layer w0.3: MD1.9 10.666,-0.764 10.666,0.929 11.782,2.045 12.486,2.045 12.75,2.309 12.75,3.013 13.482,3.745 14.518,3.745 15.29,2.973 15.29,1.91 16.1,1.1 17.685,1.1 MD4.2
M1_MBL: MD1.30 MD4.1 | length 37.7
  Bottom Layer w0.3: MD1.30 -1.904,1.27 6.816,-7.45 9.25,-7.45 17.1,0.4 20.8,0.4 21.62,1.22 MD4.1
MISO: MD1.12 MD2.3 | length 21.4
  Top Layer w0.3: MD2.3@-10.294,8.7 -10.004,8.99 -9.56,8.99 v1(-9.01,9.54)
  Bottom Layer w0.2: v1(-9.01,9.54) -9.01,8.31 -8.3,7.6 1.6,7.6 5.39,3.81 MD1.12
MOSI: MD1.13 MD2.4 | length 20.5
  Top Layer w0.3: MD2.4@-10.651,9.8 -10.191,10.26 -9.56,10.26 v1(-9.01,10.81)
  Bottom Layer w0.2: v1@-9.009,10.809 -8.4,10.2 2.3,10.2 5.936,6.564 7.406,6.564 MD1.13
NetF1_1: F1.1 MD3.6
NetF2_1: F2.1 MD4.6
NetLED1_2: LED1.2 R15.1 | length 4.7
  Top Layer w0.8: LED1.2 R15.1@-27.73,-9.345
NetLED2_2: LED2.2 R13.2 | length 7.1
  Top Layer w0.8: LED2.2 -32.066,-8.336 -30.636,-8.336 -29.275,-6.975 -29.275,-5.85 -29.25,-5.825 R13.2
NetLED3_2: LED3.2 R14.2 | length 3.7
  Top Layer w0.8: LED3.2 -32.005,-18.725 -31.025,-18.725 -31,-18.75 R14.2@-31,-19
NetQ1_4: Q1.4 R9.1 SW1.2 | length 7.8
  Top Layer w0.3: Q1.4 27.391,-13.009 27.8,-12.6 27.8,-12.4 28.051,-12.149 R9.1 29.051,-12.2 31.2,-12.2 SW1.2
NetR1_1: R1.1 U1.10 | length 11.8
  Top Layer w0.4: U1.10 21.925,8.125 28.125,14.325 28.125,14.75 28.388,15.013 R1.1@28.6,15.013
NetR2_1: R2.1 U1.11 | length 6.8
  Top Layer w0.4: U1.11 21.925,12.566 22.159,12.8 25.2,12.8 26.584,14.184 26.584,14.948 R2.1@26.611,14.975
NetR3_1: R3.1 U1.12 | length 5.6
  Top Layer w0.4: U1.12 21.275,12.928 22.347,14 23.958,14 24.192,14.234 24.192,14.75 24.417,14.975 R3.1
NetR4_1: R4.1 U1.14 | length 4.5
  Top Layer w0.4: U1.14 20,11.875 20,12.733 20.267,13 20.291,13 21.675,14.384 21.675,14.475 21.95,14.75 22.375,14.75 R4.1
NetR5_1: R5.1 U1.16 | length 4.1
  Top Layer w0.4: U1.16 18.675,12.841 20.13,14.296 20.13,14.75 20.355,14.975 R5.1
NetR6_1: R6.1 U1.17 | length 3.4
  Top Layer w0.4: U1.17 18.025,13.225 18.6,13.8 R6.1
NetR7_1: R7.1 U1.19 | length 3.2
  Top Layer w0.4: R7.1 16.725,14.85 U1.19
NetR8_1: R8.1 U1.20 | length 4
  Top Layer w0.4: R8.1@14.6,15.155 14.67,15.155 15.075,14.75 15.075,14.68 16.075,13.68 U1.20
REG_BST: C6.2 U2.6 | length 4.4
  Top Layer w0.381: U2.6 -0.05,-17.177 0.173,-17.4 1.6,-17.4 2,-17 C6.2
REG_EN: R12.2 U2.5 | length 7.3
  Top Layer w0.2: U2.5 -1,-22.7 -0.7,-23 R12.2
REG_FB: R10.1 R11.2 U2.4 | length 4.7
  Top Layer w0.381: U2.4 -1.95,-17.85 -1.851,-17.949 R10.1
REG_SW: C6.1 L1.2 U2.2 | length 4.1
  Top Layer w0.381: C6.1 v1(2,-13)
  Bottom Layer w0.381: v1(-0.7,-12.6) 1.6,-12.6 v1(2,-13)
  other v1: -1.3,-12.6 -1.3,-12 -0.7,-12 -1.3,-6.8 -0.7,-6.8 -1.3,-6.2 -0.7,-6.2
SCK: MD1.11 MD2.5 | length 29
  Top Layer w0.3: MD2.5@-10.777,11 -10.09,11 v1(-9.01,12.08)
  Bottom Layer w0.2: v1(-9.01,12.08) -8.966,12.124 -8.676,12.124 -8.1,12.7 0.983,12.7 6.192,7.491 7.04,7.491 8.093,7.49 9.12,6.463 9.12,2.77 MD1.11
SCL: MD1.36 U1.2 | length 49.6
  Top Layer w0.2: v1(16.7,5.2) 16.725,5.225 U1.2
  Bottom Layer w0.2: MD1.36 -6.57,-15.02 8.28,-15.02 9.5,-13.8 9.5,-12.5 23.4,1.4 23.4,3.75 22.6,4.55 17.35,4.55 v1(16.7,5.2)
SDA: MD1.37 U1.4 | length 50.3
  Top Layer w0.2: v1(18,5.2) 18.012,5.212 18.012,6.137 U1.4
  Bottom Layer w0.2: MD1.37 -7.433,-16.323 -6.723,-16.323 -5.77,-15.37 9.43,-15.37 10.4,-14.4 10.4,-12.675 23.9,0.825 23.9,4.083 23.083,4.9 18.381,4.9 18.081,5.2 v1(18,5.2)
SX_BUSY: MD1.23 MD2.12 | length 21.3
  Top Layer w0.3: MD2.12@-25.753,11.28 -25.503,11.53 -24.56,11.53 v1(-24.01,12.08)
  Bottom Layer w0.2: v1@-24.005,12.085 -18.99,17.1 -9.703,17.1 -7.753,19.05 MD1.23
SX_IRQ: MD1.24 MD2.13 | length 20.8
  Top Layer w0.3: MD2.13@-25.761,10.01 -25.511,10.26 -24.56,10.26 v1(-24.01,10.81)
  Bottom Layer w0.2: v1(-24.01,10.81) -18.31,16.51 MD1.24
SX_NRST: MD1.22 MD2.11 | length 22.6
  Top Layer w0.3: MD2.11@-25.851,12.55 -25.601,12.8 -24.56,12.8 v1(-24.01,13.35)
  Bottom Layer w0.2: v1(-24.01,13.35) -19.66,17.7 -10.5,17.7 -7.62,20.58 MD1.22
SX_NSS: MD1.10 MD2.6 | length 34
  Top Layer w0.3: MD2.6@-10.76,12.6 -10.56,12.8 -9.625,12.8 -9.175,13.25 -9.164,13.25 -9.064,13.35 v1(-9.01,13.35)
  Bottom Layer w0.2: v1(-9.01,13.35) -9.01,14.271 -8.261,15.02 -0.179,15.02 4.611,10.23 7,7.84 7.185,7.84 ; 7.185,7.84 8.43,7.84 9.47,6.8 9.47,0.58 MD1.10
SX_RXEN: MD1.17 MD2.8 | length 19.4
  Top Layer w0.3: MD2.8@-10.832,15.09 -10.582,15.34 -9.56,15.34 v1(-9.01,15.89)
  Bottom Layer w0.2: v1(-9.01,15.89) -8.58,15.46 -6.84,15.46 -5.79,16.51 MD1.17
SX_TXEN: MD1.21 MD2.9 | length 23.4
  Top Layer w0.3: MD2.9 -25.25,15.34 -24.56,15.34 v1(-24.01,15.89)
  Bottom Layer w0.2: v1(-24.01,15.89) -22.81,15.89 -20.4,18.3 -10.5,18.3 -8.67,20.13 -8.67,23.08 MD1.21
VBAT: C1.1 C2.1 C3.1 F1.2 F2.2 Q1.5-6-7-8 R12.1 U2.3 U3.3 | length 1.1
  Top Layer w0.5: -3,-23 R12.1
VBAT_SW: J1.P Q1.1 Q1.2 Q1.3 R9.2
  other v1: 26.2,-16.4 26.8,-16.4 27.4,-16.4 28,-16.4 28.6,-16.4 29.2,-16.4 26.2,-15.8 26.8,-15.8 27.4,-15.8 28,-15.8 28.6,-15.8 29.2,-15.8 28,-15.2 28.6,-15.2 29.2,-15.2 28,-14.6 26.2,-7.4 26.8,-7.4 27.4,-7.4 26.2,-6.8 26.8,-6.8 27.4,-6.8 26.2,-6.2 26.8,-6.2 27.4,-6.2 26.2,-5.6 26.8,-5.6 27.4,-5.6 26.2,-5 26.8,-5 27.4,-5 26.2,-4.4 26.8,-4.4 27.4,-4.4 26.2,-3.8 26.8,-3.8 27.4,-3.8
pads on no net: MD1.2 MD1.3 MD1.4 MD1.5 MD1.16 MD1.20 MD1.28 MD1.29 MD1.31 MD1.38 MD2.14 MD2.15 SW1.1 U1.1 U1.3 U1.8 U1.13 U1.18

## Polygon pours and split planes (outlines as drawn)
GND on Top Layer "GND_L01_P025" (solid, pour order 25): -37.5,-27.5 -37.5,-6.5 -30.5,-6.5 -30.5,27.5 30.5,27.5 30.5,-6.5 37.5,-6.5 37.5,-27.5
VBAT_SW on Top Layer "VBAT_SW_L01_P023" (solid, pour order 23): 25.8,-16.8 25.8,-15.8 25.8,-13.4 29.8,-13.4 29.8,-16.8
VBAT_SW on Top Layer "VBAT_SW_L01_P021" (solid, pour order 21): 12.8,2 12.8,3.2 14.6,5 14.6,8 13.8,8.8 10.6,8.8 8.6,6.8 8.6,-4.2 10,-5.6 23.6,-5.6 25.8,-7.8 27.8,-7.8 27.8,-3.4 23.8,0.6 14.2,0.6
VBAT on Top Layer "VBAT_L01_P019" (solid, pour order 19): 25.4,-15.4 25.4,-12.6 22.8,-10 10.4,-10 9,-11.4 9,-17.6 13,-17.6 13,-14.4 13.6,-13.8 18.6,-13.8 20.2,-15.4
NetF1_1 on Top Layer "NETF1_1_L01_P018" (solid, pour order 18): -20,-22.4 -20,-14.4 -18.2,-14.4 -18.2,-22.4
NetF2_1 on Top Layer "NETF2_1_L01_P016" (solid, pour order 16): 15.6,-22 15.6,-14.4 17.6,-14.4 17.6,-22
VBAT on Top Layer "VBAT_L01_P015" (solid, pour order 15): -6.4,2.8 -4,5.2 -1.8,5.2 -1.8,3.6 -4.2,1.2 -4.2,-8 -6.4,-8
VBAT on Top Layer "VBAT_L01_P014" (solid, pour order 14): -6.4,-27.3 -6.4,-7.6 -2.2,-7.6 -2.2,-11.6 -1.7,-12.1 -1.7,-14.6 -2.5,-15.4 -2.5,-27.3
VBAT on Top Layer "VBAT_L01_P013" (solid, pour order 13): -15.8,-17.6 -15.8,-14.4 -12.4,-14.4 -9.8,-17 -9.8,-24.2 -8.8,-25.2 8.6,-25.2 9,-24.8 9,-16.6 11.2,-14.4 12.8,-14.4 12.8,-24.8 10.2,-27.4 -11.2,-27.4 -12.6,-26 -12.6,-20.8
3V3 on Top Layer "3V3_L01_P006" (solid, pour order 6): 0.2,-7.2 0.2,0 0.4,0.2 3.6,0.2 3.8,0 3.8,-5.6 3.8,-7.2
REG_SW on Top Layer "REG_SW_L01_P005" (solid, pour order 5): -1.4,-7.1 -1.6,-6.9 -1.6,-6 -1.8,-5.8 -3.6,-5.8 -3.8,-5.6 -3.8,0 -3.6,0.2 -0.4,0.2 -0.2,0 -0.2,-5.8 -0.4,-6 -0.4,-6.9 -0.6,-7.1
GND on Top Layer "GND_L01_P004" (solid, pour order 4): 3.6,-12.4 1.4,-12.4 1,-12.8 1,-13.8 0.6,-14.2 -0.4,-14.2 -0.4,-13.2 -0.2,-13 -0.2,-11.6 -0.4,-11.4 -1.6,-11.4 -1.8,-11.2 -1.8,-7.6 3.8,-7.6 3.8,-12.2
REG_SW on Top Layer "REG_SW_L01_P000" (solid, pour order 0): -1.4,-14.2 -1.4,-13 -1.6,-12.8 -1.6,-11.8 -1.4,-11.6 -0.6,-11.6 -0.4,-11.8 -0.4,-12.8 -0.6,-13 -0.6,-14.2
M0_B on Bottom Layer "M0_B_L02_P010" (solid, pour order 10): -16.3,-26.6 -16.3,-23.8 -15.1,-22.6 -15.1,-20.7 -14.6,-20.2 -13.4,-20.2 -12.9,-20.7 -12.9,-26.6
M0_A on Bottom Layer "M0_A_L02_P009" (solid, pour order 9): -20,-26.6 -20,-24.7 -17.5,-22.2 -17.5,-20.7 -17,-20.2 -16.1,-20.2 -15.9,-20.4 -15.6,-20.7 -15.6,-22.6 -16.7,-23.7 -16.7,-26.6
GND on Bottom Layer "GND_L02_P024" (solid, pour order 24): -37.5,-27.5 -37.5,-6.5 -30.5,-6.5 -30.5,27.5 30.5,27.5 30.5,-6.5 37.5,-6.5 37.5,-27.5
VBAT_SW on Bottom Layer "VBAT_SW_L02_P022" (solid, pour order 22): 24.8,-16.8 29.8,-16.8 29.8,-3.2 24.8,-3.2
M1_B on Bottom Layer "M1_B_L02_P012" (solid, pour order 12): 21.7,-26.4 21.7,-24.4 20.5,-23.2 20.5,-20.4 21,-19.9 22.3,-19.9 22.8,-20.4 22.8,-21.8 25.1,-24.1 25.1,-26.4
M1_A on Bottom Layer "M1_A_L02_P011" (solid, pour order 11): 18,-26.4 18,-20.4 18.5,-19.9 19.6,-19.9 20.1,-20.4 20.1,-23.5 21.3,-24.7 21.3,-26.4
REG_SW on Bottom Layer "REG_SW_L02_P007" (solid, pour order 7): -1.6,-12.8 -1.5,-12.9 -0.5,-12.9 -0.4,-12.8 -0.4,-6 -0.5,-5.9 -1.5,-5.9 -1.6,-6

## Keep-outs
Keep-Out Layer:
  rectangle: -25.6,20.8 -10.4,30.8

## Text inside footprints (layer, text, board x,y; h text height)
MD2: Top Overlay "E28 2G4MxxS" at -17.254,6.454 h1.52 r90
MD3: Top Overlay "GND" at -22.382,-15.531 h1.52 r270; Top Overlay "VCC" at -19.842,-15.531 h1.52 r270; Top Overlay "MA" at -17.302,-17.182 h1.52 r270; Top Overlay "MB" at -14.762,-17.182 h1.52 r270; Top Overlay "MAH" at -22.509,0.217 h1.52 r270; Top Overlay "MAL" at -19.842,0.217 h1.52 r270; Top Overlay "MBH" at -17.302,0.217 h1.52 r270; Top Overlay "MBL" at -14.762,0.217 h1.52 r270
MD4: Top Overlay "GND" at 13.238,-15.031 h1.52 r270; Top Overlay "VCC" at 15.778,-15.031 h1.52 r270; Top Overlay "MA" at 18.318,-16.682 h1.52 r270; Top Overlay "MB" at 20.858,-16.682 h1.52 r270; Top Overlay "MAH" at 13.111,0.717 h1.52 r270; Top Overlay "MAL" at 15.778,0.717 h1.52 r270; Top Overlay "MBH" at 18.318,0.717 h1.52 r270; Top Overlay "MBL" at 20.858,0.717 h1.52 r270